# EAGLE board DigBMPproto (EAGLE 7.1.0)

Size 100 x 80 mm. Coordinates in mm from the lower left corner, seen from the top.
Outline: 0,0 100,0 100,80 0,80 0,0
Copper layers (1*16): Top 0.035mm / dielectric 1.5mm / Bottom 0.035mm
Design rules "default": minimum track width 10mil, minimum drill 24mil, track to track 8mil, track to pad 8mil, pad to pad 8mil, via to via 8mil, smd to smd 8mil, copper to edge 40mil, drill to drill 8mil, minimum pad ring 10mil, minimum via ring 8mil, stop-mask expansion 4mil, vias tented up to drill 0mil, thermal gap 10mil

## Footprints (pad centres in the part's own frame; a part is rotated, then mirrored left to right if it is on the bottom)
C050-025X075 = drill 0.813 octagon: 1 -2.54,0; 2 2.54,0
E2,5-5 = drill 0.813 pad 1.6: + -1.27,0 | drill 0.813 pad 1.6 octagon: - 1.27,0
C3216 = smd 1.6 x 1.8: 1 -1.4,0; 2 1.4,0
DO35-7 = drill 0.813 long: A 3.81,0; C -3.81,0
AB9V = drill 1.118 pad 3.15 octagon: + 0,2.54; - 0,-2.54
SO08 = smd 0.61 x 2.21: 1 -1.905,-2.616; 2 -0.635,-2.616; 3 0.635,-2.616; 4 1.905,-2.616; 5 1.905,2.616; 6 0.635,2.616; 7 -0.635,2.616; 8 -1.905,2.616
DIL14 = drill 0.813 long: 1 -7.62,-3.81; 2 -5.08,-3.81; 3 -2.54,-3.81; 4 0,-3.81; 5 2.54,-3.81; 6 5.08,-3.81; 7 7.62,-3.81; 8 7.62,3.81; 9 5.08,3.81; 10 2.54,3.81; 11 0,3.81; 12 -2.54,3.81; 13 -5.08,3.81; 14 -7.62,3.81
DIL08 = drill 0.813 pad 1.6 octagon: 1 -3.81,-3.81; 2 -1.27,-3.81; 3 1.27,-3.81; 4 3.81,-3.81; 5 3.81,3.81; 6 1.27,3.81; 7 -1.27,3.81; 8 -3.81,3.81
TO92 = drill 0.813 octagon: 1 -1.27,0; 2 0,1.905; 3 1.27,0
DIL08' = drill 0.813 pad 1.27: 1 -3.81,-3.81; 2 -1.27,-3.81; 3 1.27,-3.81; 4 3.81,-3.81; 5 3.81,3.81; 6 1.27,3.81; 7 -1.27,3.81; 8 -3.81,3.81
1_05X2MM = drill 1.016 pad 1.3 square: 1 -4,0 | drill 1.016 pad 1.3: 2 0,0; 3 -2,0; 4 2,0; 5 4,0
DIL06 = drill 0.813 offset: 1 -2.54,-3.81; 2 0,-3.81; 3 2.54,-3.81; 4 2.54,3.81; 5 0,3.81; 6 -2.54,3.81
1,6/0,8 = drill 0.813 pad 1.6 octagon: 1 0,0
M1206 = smd 1.6 x 2: 1 -1.4,0; 2 1.4,0
0207/7 = drill 0.813 octagon: 1 -3.81,0; 2 3.81,0
PT-10 = drill 1.016 pad 1.778 octagon: 1 -2.54,-5.08; 2 2.54,-5.08; 3 0,5.08
P1-13 = drill 1.321 pad 2.159 octagon: TP 0,0
TBP_AN = drill 0.813 long: 1 -5.75,1.27; 2 -5.75,-1.27; 3 5.75,-1.27; 4 5.75,1.27

## Placement (x,y rotation side)
C1  100n  [C050-025X075]  -53.34,34.29 0 top  (outside the outline)
C2  10u  [E2,5-5]  -39.37,50.8 0 top  (outside the outline)
C3  100n  [C3216]  -48.26,44.45 0 top  (outside the outline)
C4  100nF  [C3216]  -35.56,44.45 0 top  (outside the outline)
C6  1u  [C3216]  -59.69,44.45 0 top  (outside the outline)
C7  1u  [C3216]  -64.77,44.45 0 top  (outside the outline)
C8  1u  [C3216]  -15.24,50.8 0 top  (outside the outline)
C10  10u  [C3216]  -20.32,50.8 0 top  (outside the outline)
C11  1u  [C3216]  -25.4,50.8 0 top  (outside the outline)
CX  47nF  [C3216]  -41.91,44.45 0 top  (outside the outline)
CY  47n  [C3216]  -30.48,50.8 0 top  (outside the outline)
D1  1N4148DO35-7  [DO35-7]  -24.13,44.45 0 top  (outside the outline)
G1  AB9V  [AB9V]  -62.23,20.32 0 top  (outside the outline)
IC1  INA126U  [SO08]  -44.45,34.29 0 top  (outside the outline)
IC2  TL084P  [DIL14]  -33.02,21.59 0 top  (outside the outline)
IC3  REF102P  [DIL08]  -49.53,20.32 0 top  (outside the outline)
IC4  7805L  [TO92]  -50.8,49.53 0 top  (outside the outline)
IC5  OP07Z  [DIL08']  -19.05,35.56 0 top  (outside the outline)
IC6  OP07Z  [DIL08']  -31.75,35.56 0 top  (outside the outline)
JP1  [1_05X2MM]  -48.26,66.04 0 top  (outside the outline)
OK1  4N35  [DIL06]  -57.15,7.62 0 top  (outside the outline)
OK2  4N35  [DIL06]  -17.78,22.86 0 top  (outside the outline)
PAD1  [1,6/0,8]  -33.02,71.12 0 top  (outside the outline)
PAD2  [1,6/0,8]  -39.37,71.12 0 top  (outside the outline)
R1  1.2k  [M1206]  -54.61,44.45 0 top  (outside the outline)
R2  82k  [0207/7]  -58.42,49.53 0 top  (outside the outline)
R3  150k  [0207/7]  -17.78,55.88 0 top  (outside the outline)
R4  82k  [0207/7]  -27.94,55.88 0 top  (outside the outline)
R5  150k  [0207/7]  -38.1,55.88 0 top  (outside the outline)
R6  56k  [0207/7]  -48.26,55.88 0 top  (outside the outline)
R7  8.2k  [0207/7]  -58.42,55.88 0 top  (outside the outline)
R8  [PT-10]  -19.05,6.35 0 top  (outside the outline)
R9  10k  [0207/7]  -17.78,60.96 0 top  (outside the outline)
R10  220k  [0207/7]  -27.94,60.96 0 top  (outside the outline)
R11  12k  [0207/7]  -38.1,60.96 0 top  (outside the outline)
R12  [PT-10]  -30.48,6.35 0 top  (outside the outline)
R13  470k  [0207/7]  -48.26,60.96 0 top  (outside the outline)
R14  100k  [0207/7]  -58.42,60.96 0 top  (outside the outline)
R15  1k  [0207/7]  -17.78,66.04 0 top  (outside the outline)
R17  100k  [0207/7]  -27.94,66.04 0 top  (outside the outline)
R18  470K  [0207/7]  -38.1,66.04 0 top  (outside the outline)
TP1  PTR1PAD1-13  [P1-13]  -57.15,66.04 0 top  (outside the outline)
TP2  PTR1PAD1-13  [P1-13]  -62.23,66.04 0 top  (outside the outline)
TP3  PTR1PAD1-13  [P1-13]  -67.31,66.04 0 top  (outside the outline)
TP4  PTR1PAD1-13  [P1-13]  -16.51,71.12 0 top  (outside the outline)
TP5  PTR1PAD1-13  [P1-13]  -21.59,71.12 0 top  (outside the outline)
TP6  PTR1PAD1-13  [P1-13]  -26.67,71.12 0 top  (outside the outline)
U1  TBP_AN  [TBP_AN]  -44.45,7.62 0 top  (outside the outline)

## Library data of the parts
C1-C4 C6-C8 C10 C11 CX CY R2-R15 R17 R18 = rcl
D1 = diode
G1 = battery
IC1 = burr-brown; MF: TEXAS INSTRUMENTS; MPN: INA126U; OC_FARNELL: 1212409; OC_NEWARK: 84K8003
IC2 IC4-IC6 = linear
IC3 = burr-brown; MF: TEXAS INSTRUMENTS; MPN: REF102AP; OC_FARNELL: 1097429; OC_NEWARK: 10M5244
JP1 = pinhead
OK1 OK2 = optocoupler; MF: FAIRCHILD SEMICONDUCTOR; MPN: 4N35; OC_FARNELL: 1328375; OC_NEWARK: 72K9946
PAD1 PAD2 = wirepad
R1 = resistor
TP1-TP6 = testpad
U1 = honeywell

## Nets
GND: CX.2 CY.2 IC1.5 IC2.1 IC2.2 IC2.9 IC2.13 IC3.4 R7.1 R9.1 R11.1 R15.1 U1.3
N$1: IC2.3 R13.1 R18.2
N$2: IC2.7 R2.1 R6.2 TP4.TP
N$3: IC1.1 R1.2
N$4: IC1.8 R1.1
N$5: IC2.10 R3.2
N$6: C4.1 CX.1 R2.2 R3.1
N$7: IC5.6 IC6.3 R10.2 R14.2 TP5.TP
N$8: IC6.6 R4.1 R17.2 TP6.TP
N$9: C10.2 IC5.3
N$10: C3.1 CY.1 R4.2 R5.1
N$11: IC2.6 R7.2 R12.1
N$12: IC4.1
N$13: C3.2 IC2.14
N$14: R6.1 R12.2
N$16: IC5.2 R9.2 R14.1
N$17: C6.2 C7.2 C8.2 C10.1 C11.2 R10.1 R11.2
N$19: IC6.2 R8.1 R15.2
N$20: IC2.12 R5.2
N$22: R8.2 R17.1
V+: C1.1 C2.+ G1.+ IC1.3 IC1.7 IC2.4 IC3.2 IC4.3 IC5.7 IC6.7 R13.2 TP1.TP
V-: C1.2 C2.- G1.- IC1.2 IC1.4 IC2.11 IC4.2 IC5.4 IC6.4 R18.1 TP2.TP
V_INA: C6.1 C7.1 C8.1 C11.1 IC1.6 IC2.5 TP3.TP
V_PRE: C4.2 IC2.8
VCC: IC3.6 U1.1

## Tracks (layer width: path | path; a pad name or v marks a point on that pad's centre or on a via)
GND  (12 unrouted)
N$1  (2 unrouted)
N$2  (3 unrouted)
N$3  (1 unrouted)
N$4  (1 unrouted)
N$5  (1 unrouted)
N$6  (3 unrouted)
N$7  (4 unrouted)
N$8  (3 unrouted)
N$9  (1 unrouted)
N$10  (3 unrouted)
N$11  (2 unrouted)
N$13  (1 unrouted)
N$14  (1 unrouted)
N$16  (2 unrouted)
N$17  (6 unrouted)
N$19  (2 unrouted)
N$20  (1 unrouted)
N$22  (1 unrouted)
V+  (11 unrouted)
V-  (10 unrouted)
V_INA  (6 unrouted)
V_PRE  (1 unrouted)
VCC  (1 unrouted)